# Altium PCB TempHumidPCBV2.PcbDoc
Units mil, origin at the board's own origin, x right, y up, seen from the top; angles counter-clockwise.
Board outline 2150 x 1935 mil, 2 copper layers (Top Layer, Bottom Layer), stack 65.792 mil thick; 51 components, 32 nets, 187 pads, 63 vias.
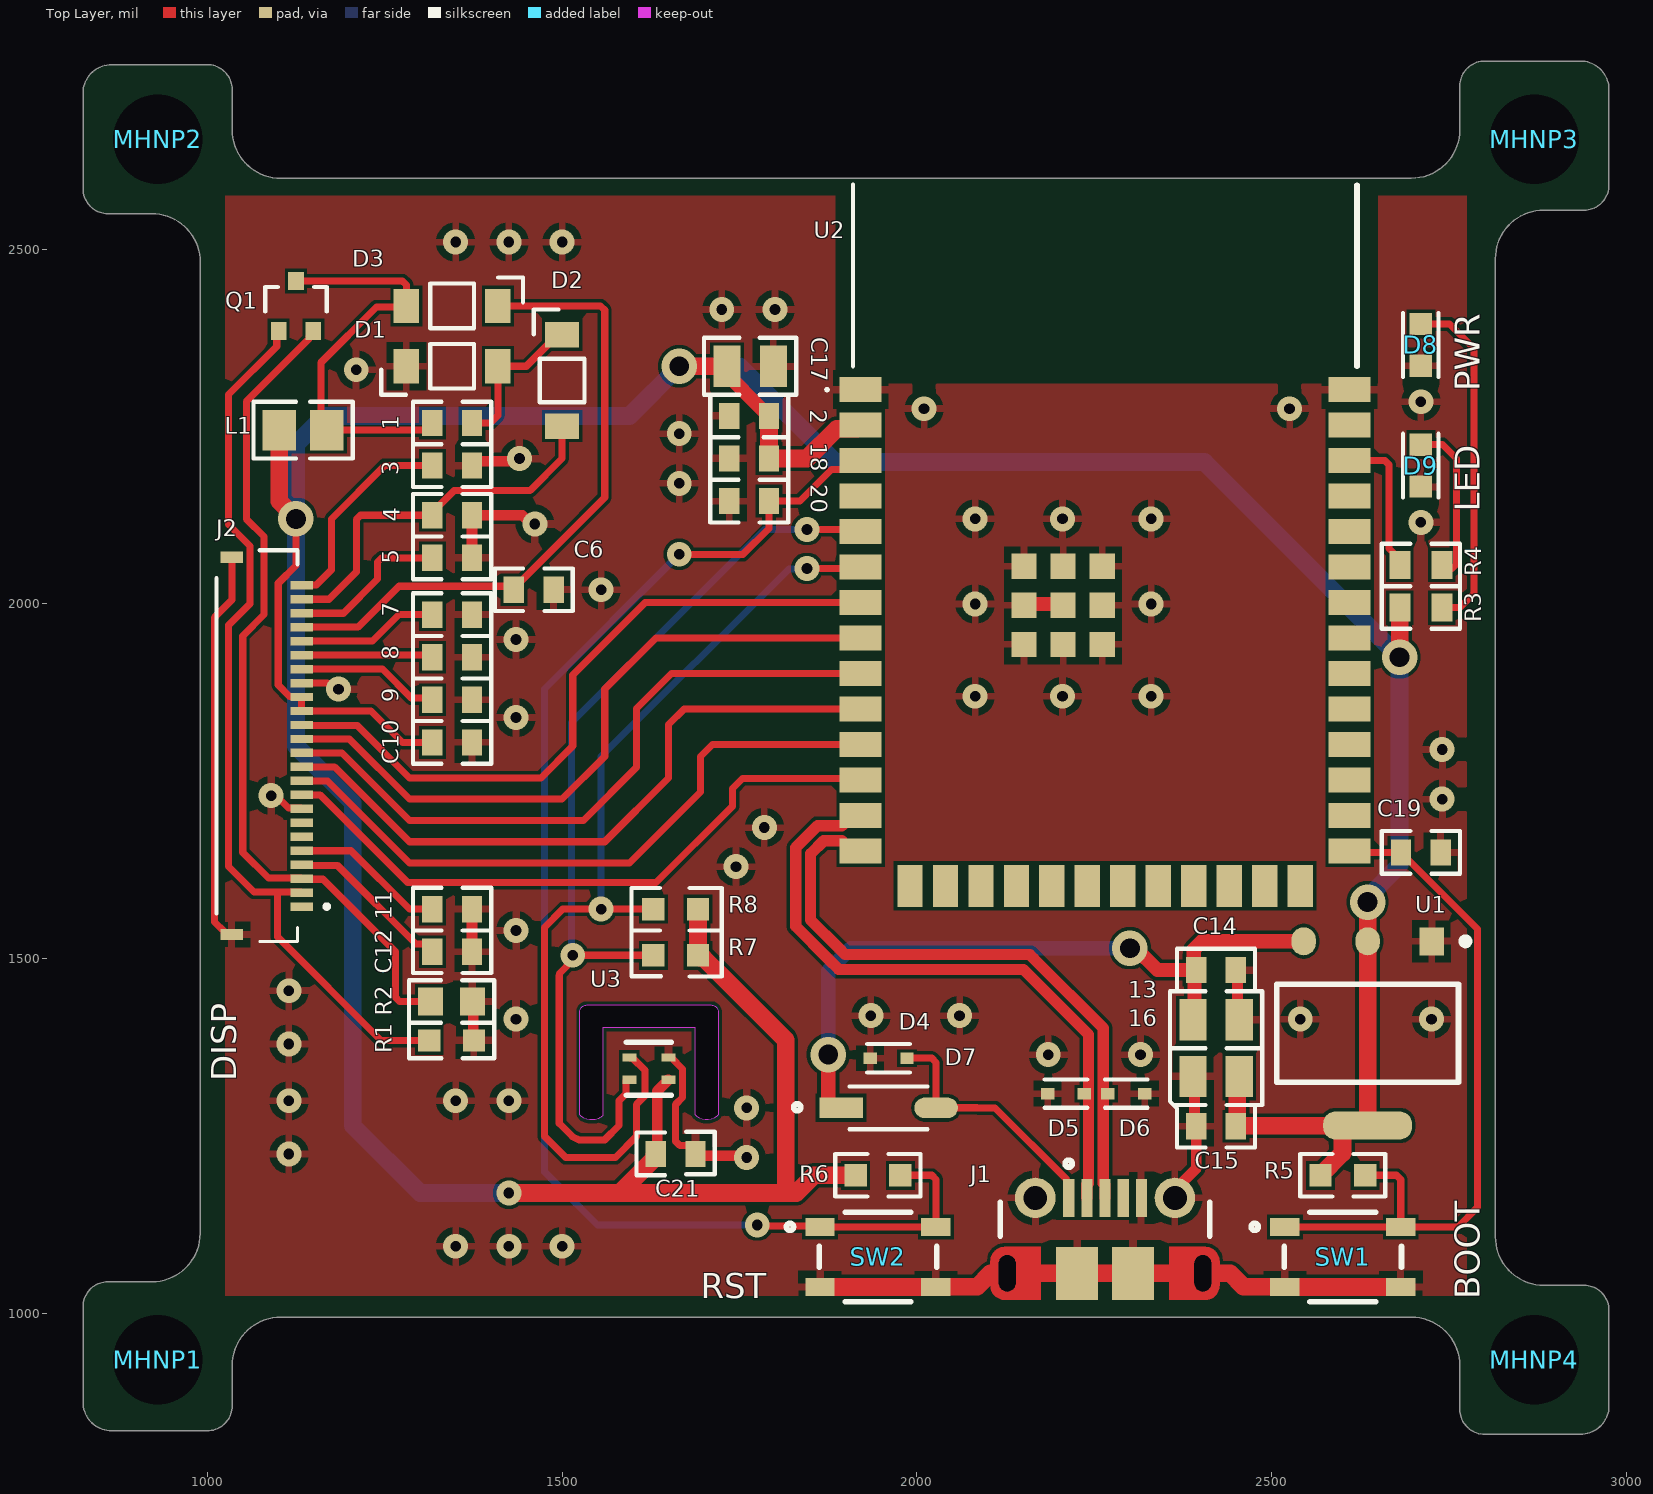
[diagram p0: Top Layer view]
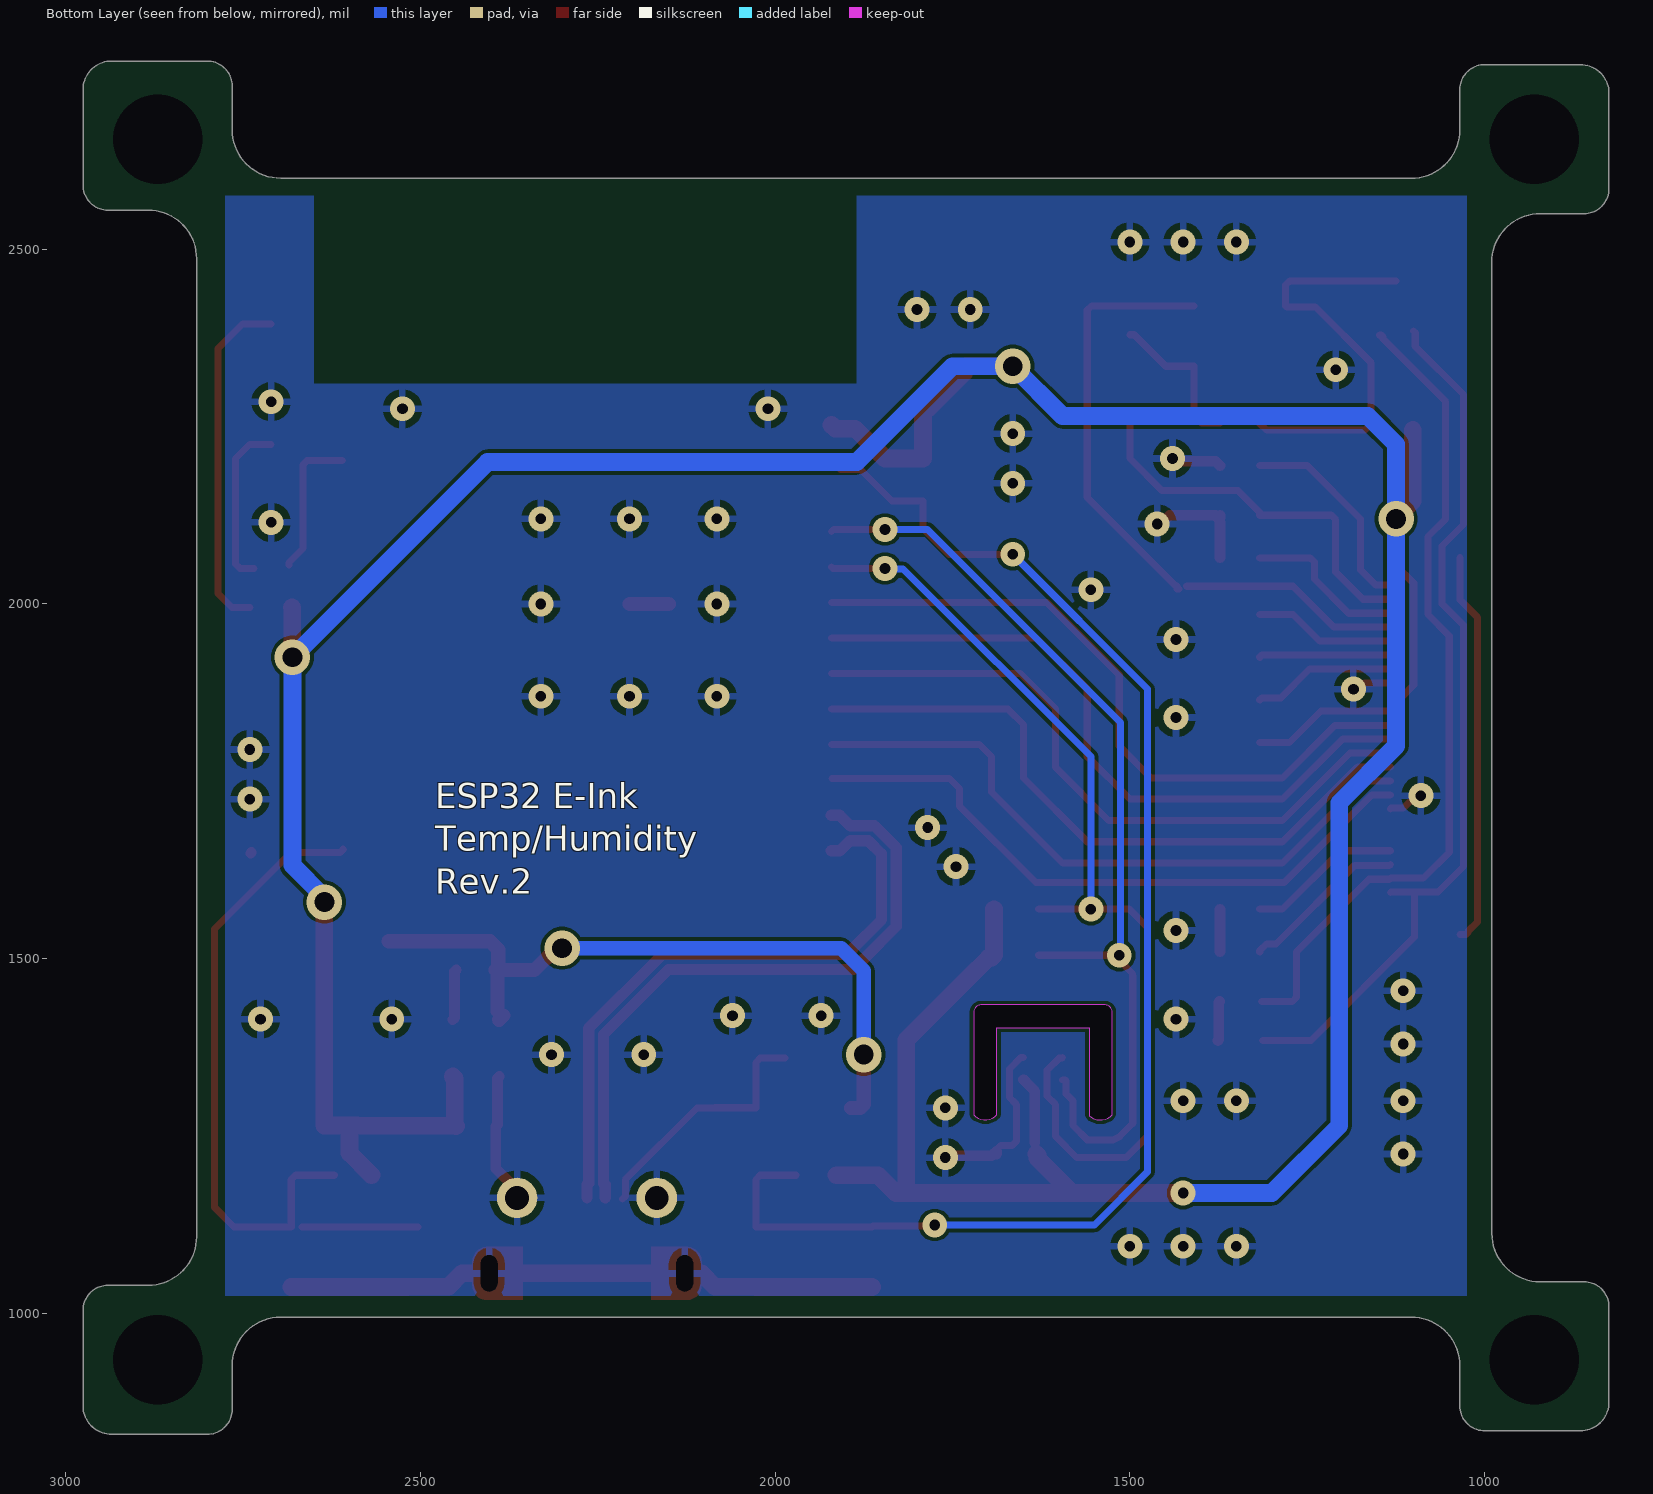
[diagram p1: Bottom Layer view, seen from below]
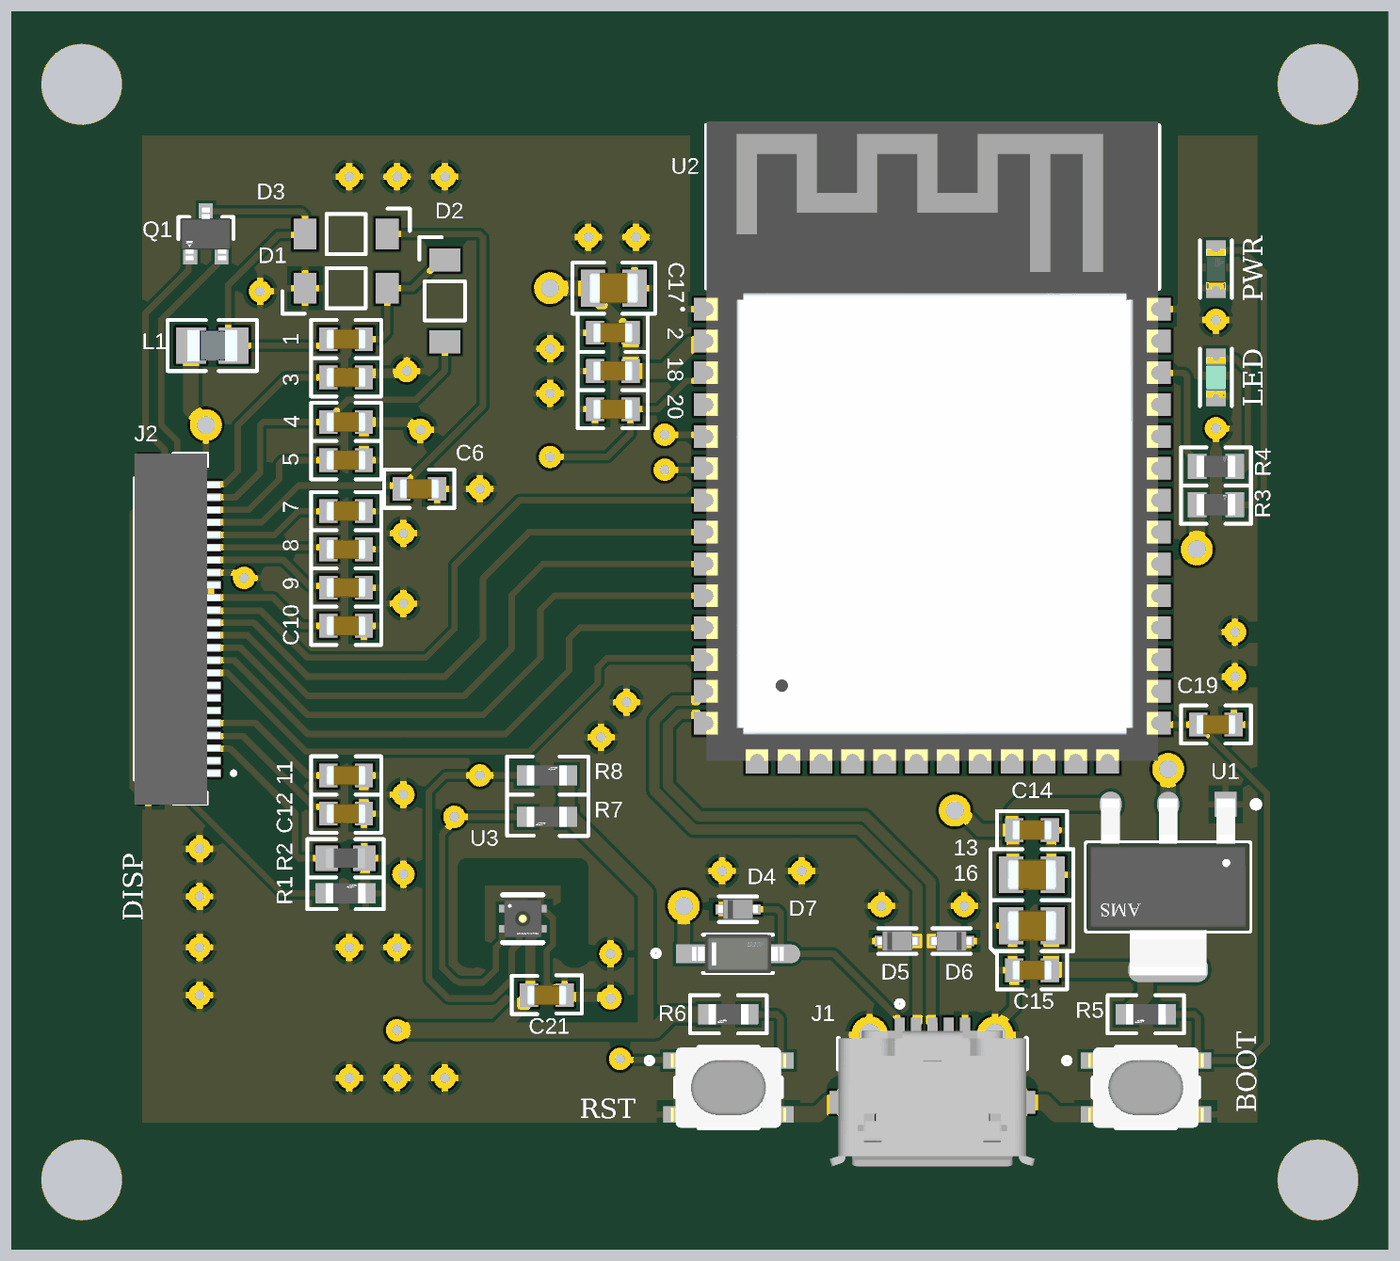
[diagram p2: 3D render of the assembled board from above, using the file's embedded part models]

## Layer stack, top to bottom
Top Solder: solder mask 0.4, Solder Resist, Dk 3.5
Top Layer: signal copper 1.4
Dielectric 1: dielectric 62.992, FR-4, Dk 4.8
Bottom Layer: signal copper 1.4
Bottom Solder: solder mask 0.4, Solder Resist, Dk 3.5

## Board outline
825,875 825,1010 cw(c860,1010) 860,1045 921.72,1045 ccw(c921.72,1113.28) 990,1113.28 990,2481.72 ccw(c921.72,2481.72) 921.72,2550 860,2550 cw(c860,2585) 825,2585 825,2720 cw(c865,2720) 865,2760 1000,2760 cw(c1000,2725) 1035,2725 1035,2668.28 ccw(c1103.28,2668.28) 1103.28,2600 2696.72,2600 ccw(c2696.72,2668.28) 2765,2668.28 2765,2730 cw(c2800,2730) 2800,2765 2935,2765 cw(c2935,2725) 2975,2725 2975,2590 cw(c2940,2590) 2940,2555 2883.28,2555 ccw(c2883.28,2486.72) 2815,2486.72 2815,1108.28 ccw(c2883.28,1108.28) 2883.28,1040 2940,1040 cw(c2940,1005) 2975,1005 2975,870 cw(c2935,870) 2935,830 2800,830 cw(c2800,865) 2765,865 2765,926.72 ccw(c2696.72,926.72) 2696.72,995 1103.28,995 ccw(c1103.28,926.72) 1035,926.72 1035,870 cw(c1000,870) 1000,835 865,835 cw(c865,875)
cut-out: 1525,1280.23 1525,1425 cw(c1535,1425) 1535,1435 1710,1435 cw(c1710,1425) 1720,1425 1720.26,1280 cw(c1703.85,1296.58) 1687.28,1280.17 1687.28,1402.67 1557.28,1402.67 1557.28,1279.17 cw(c1541.67,1295.84)

## Design rules (kind name [scope] priority, off if disabled: settings)
Clearance Clearance_1 [All] p1: gap=5 ignorepadtopadclearanceinfootprint=TRUE
DiffPairsRouting [All] p1: maxlimit=5 minlimit=5 mostfreqgap=5 toplayer_minwidth=16.09 toplayer_maxwidth=16.09 toplayer_prefwidth=16.09 bottomlayer_minwidth=16.09 bottomlayer_maxwidth=16.09 bottomlayer_prefwidth=16.09 impedanceprofiledriven=TRUE maxuncoupledlength=500
HoleSize [All] p1: absolutevalues=TRUE maxlimit=200 minlimit=1 maxpercent=80.000 minpercent=20.000
MinimumSolderMaskSliver [All] p1: minsoldermaskwidth=0
PolygonConnect [All] p1: connectstyle=Relief reliefconductorwidth=10 reliefentries=4 polygonreliefangle="90 Angle" airgapwidth=10
RoutingVias [All] p1: holewidth=15 width=35 viastyle="Through Hole" minholewidth=15 minwidth=35 maxholewidth=28 maxwidth=50
SilkToSilkClearance [All] p1: silktosilkclearance=6
SilkToSolderMaskClearance [IsPad] p1: minsilkscreentomaskgap=6 clearancetoexposedcopper=TRUE
SolderMaskExpansion [All] p1: expansion=4 istentingtop=FALSE
SupplyNets "Schematic Supply Nets_3" [InNet('GND')] p1: voltage=0.000
SupplyNets "Schematic Supply Nets" [InNet('VCC_5V')] p2: voltage=0.000
Width [All] p1: maxlimit=25 minlimit=10 preferedwidth=10
25 further rules are at their usual default settings.

## Classes and differential pairs
component class DriverForDisplay: 3 4 5 7 8 9 10 11 C1 C6 C10 C12 D1 D2 D3 J2 L1 MHNP1 MHNP2 MHNP4 Q1 R1 R2
component class CustomESP32: 2 13 16 18 C14 C15 C17 C19 C20 C21 D4 D5 D6 D7 D8 D9 J1 LED R3 R4 R5 R6 R7 R8 SW1 SW2 U1 U2 U3
differential pair GPIO: +GPIO_P -GPIO_N

## Components (designator, comment, footprint, x,y, rotation, side; value= is the part's Value field where it differs from the comment)
1 "4.7uF" CAPC1608X90N 1345,2255 r0 top (schematic designator C1)
2 "4.7uF" CAPC1608X90N 1763.58,2265 r0 top (schematic designator C2)
3 "1uF 16V" CAPC1608X90N 1345,2195 r0 top (schematic designator C3)
4 "1uF 16V" CAPC1608X90N 1345,2125 r0 top (schematic designator C4)
5 "1uF 16V" CAPC1608X90N 1345,2065 r0 top (schematic designator C5)
7 "1uF 16V" CAPC1608X90N 1345,1985 r0 top (schematic designator C7)
8 "1uF 16V" CAPC1608X90N 1345,1925 r0 top (schematic designator C8)
9 "1uF 16V" CAPC1608X90N 1345,1865 r0 top (schematic designator C9)
11 "1uF 16V" CAPC1608X90N 1345,1570 r0 top (schematic designator C11)
13 "10uF 25V" CAPC2012X145N 2421.42,1414.18 r0 top (schematic designator C13)
16 "10uF 25V" CAPC2012X145N 2421.42,1334.18 r180 top (schematic designator C16)
18 "100nF 50V" CAPC1608X90N 1763.58,2205 r180 top (schematic designator C18)
20 "1uF 16V" CAPC1608X90N 1763.58,2145 r0 top (schematic designator C20)
C6 "1uF 16V" CAPC1608X90N 1460,2020 r0 top
C10 "0.1uF 50V" CAPC1608X90N 1345,1805 r0 top
C12 "1uF 16V" CAPC1608X90N 1345,1510 r0 top
C14 "100nF 50V" CAPC1608X90N 2421.42,1484.18 r0 top
C15 "100nF 50V" CAPC1608X90N 2421.42,1264.18 r180 top
C17 "10uF 25V" CAPC2012X145N 1765,2335 r0 top
C19 "100nF 50V" CAPC1608X90N 2710,1650 r0 top
C21 "100nF 50V" CAPC1608X90N 1660,1225 r180 top
D1 "MBR0530T1G" ONSC-SOD-123-2-425-04_V 1345,2335 r0 top
D2 "MBR0530T1G" ONSC-SOD-123-2-425-04_V 1500,2315 r270 top
D3 "MBR0530T1G" ONSC-SOD-123-2-425-04_V 1345,2420 r180 top
D4 "LESD5D5.0CT1G" LESD5D50CT1G 1960,1360 r0 top
D5 "LESD5D5.0CT1G" LESD5D50CT1G 2210,1310 r0 top
D6 "LESD5D5.0CT1G" LESD5D50CT1G 2295,1310 r180 top
D7 "1N5819HW-7-F" FP-SOD123-IPC_A 1960,1290 r0 top
D8 "RED LED" FP-6_541-5092_01-4-MFG 2710,2365 r90 top
D9 "BLUE LED" FP-6_541-5094_01-4-MFG 2710,2195 r90 top
J1 "Micro USB" USB-MICRO-B_V 2265,1110 r0 top
J2 "FPC24" FH34SRJ24S05SH50 1070,1800 r270 top locked
L1 "68uH" INDC2012X145N 1135,2245 r180 top
MHNP1 "CMP-011-000000-1" MTHNP3P2MM#1 1085,1095 r90 top
MHNP2 "CMP-011-000000-1" MTHNP3P2MM#2 2715,2505 r90 top
MHNP3 "CMP-011-000000-1" MTHNP3P2MM#3 2910,2695 r90 top
MHNP4 "CMP-011-000000-1" MTHNP3P2MM#4 2895,940 r90 top
Q1 "SI1308EDL-T1-GE3" FP-5549-MFG 1125,2420 r90 top
R1 "10k" FP-RC1608-MFG 1344.25,1385 r0 top
R2 "0.47" RESC1608X55N 1344.25,1440 r0 top
R3 "5.1k" FP-CRCW0603-e3-MFG 2710,1995 r0 top
R4 "5.1k" FP-CRCW0603-e3-MFG 2710,2055 r0 top
R5 "10k" FP-RC1608-MFG 2600,1195 r180 top
R6 "10k" FP-RC1608-MFG 1945,1195 r180 top
R7 "10k" FP-RC1608-MFG 1660,1505 r180 top
R8 "10k" FP-RC1608-MFG 1660,1570 r0 top
SW1 "PTS810SJM250SMTRLFS" FP-PTS810SJM250SMTRLFS-MFG 2600,1080 r0 top
SW2 "PTS810SJM250SMTRLFS" FP-PTS810SJM250SMTRLFS-MFG 1945,1080 r0 top
U1 "AMS1117-3.3" FP-AMS1117-IPC_C 2635,1395 r270 top
U2 "ESP32-S3-WROOM-1-N16R8" ESP32S3WROOM1N16R8 2265,2095 r0 top
U3 "SHT40" FP-SHT40-AD1B-R2-MFG 1622.28,1345.17 r0 top

## Footprints (in the part's own frame and the unit in brackets; to place one, negate y for a bottom-side part, rotate by r counter-clockwise, add the part's x,y. Pads: shape width x height; smd on the part's side, far side on the other; paste and mask are expansions set on the pad)
CAPC1608X90N [mm]
  rect 0.73x0.94 smd: 1(-0.71,0) 2(0.71,0)
  body extent -0.8,-0.4 0.8,0.4, height 0.9
CAPC2012X145N [mm]
  rect 0.97x1.47 smd: 1(-0.83,0) 2(0.83,0)
  body extent -1,-0.63 1,0.63, height 1.45
ESP32S3WROOM1N16R8 [mm]
  rect 1.5x0.9 smd: 1(-8.75,5.26) 2(-8.75,3.99) 3(-8.75,2.72) 4(-8.75,1.45) 5(-8.75,0.18) 6(-8.75,-1.09) 7(-8.75,-2.36) 8(-8.75,-3.63) 9(-8.75,-4.9) 10(-8.75,-6.17) 11(-8.75,-7.44) 12(-8.75,-8.71) 13(-8.75,-9.98) 14(-8.75,-11.25) 27(8.75,-11.25) 28(8.75,-9.98) 29(8.75,-8.71) 30(8.75,-7.44) 31(8.75,-6.17) 32(8.75,-4.9) 33(8.75,-3.63) 34(8.75,-2.36) 35(8.75,-1.09) 36(8.75,0.18) 37(8.75,1.45) 38(8.75,2.72) 39(8.75,3.99) 40(8.75,5.26)
  rect 0.9x1.5 smd: 15(-6.985,-12.5) 16(-5.715,-12.5) 17(-4.445,-12.5) 18(-3.175,-12.5) 19(-1.905,-12.5) 20(-0.635,-12.5) 21(0.635,-12.5) 22(1.905,-12.5) 23(3.175,-12.5) 24(4.445,-12.5) 25(5.715,-12.5) 26(6.985,-12.5)
  rect 0.9x0.9 smd: 41(-1.5,-2.46) 42(-2.9,-1.06) 43(-2.9,-2.46) 44(-2.9,-3.86) 45(-1.5,-3.86) 46(-0.1,-3.86) 47(-0.1,-2.46) 48(-0.1,-1.06) 49(-1.5,-1.06)
  silkscreen extent -10,5.21 9.02,12.61, body extent -9,-12.75 9,12.75, height 3.26
FH34SRJ24S05SH50 [mm]
  rect 0.3x0.8 smd: 1(5.75,1.6) 2(5.25,1.6) 3(4.75,1.6) 4(4.25,1.6) 5(3.75,1.6) 6(3.25,1.6) 7(2.75,1.6) 8(2.25,1.6) 9(1.75,1.6) 10(1.25,1.6) 11(0.75,1.6) 12(0.25,1.6) 13(-0.25,1.6) 14(-0.75,1.6) 15(-1.25,1.6) 16(-1.75,1.6) 17(-2.25,1.6) 18(-2.75,1.6) 19(-3.25,1.6) 20(-3.75,1.6) 21(-4.25,1.6) 22(-4.75,1.6) 23(-5.25,1.6) 24(-5.75,1.6)
  rect 0.4x0.8 smd: MP1(6.75,-0.9) MP2(-6.75,-0.9)
  silkscreen extent -7,-1.45 7,2.55, body extent -7,-1.45 7,1.97, height 1.85
FP-6_541-5092_01-4-MFG [mm]
  rect 0.8x0.8 smd paste+0 mask+0: 1(-0.75,0) 2(0.75,0)
  body extent -1.25,-0.6 1.25,0.6, height 0.25
FP-6_541-5094_01-4-MFG [mm]
  rect 0.8x0.8 smd paste+0 mask+0: 1(-0.75,0) 2(0.75,0)
  body extent -1.25,-0.6 1.25,0.6, height 0.25
FP-5549-MFG [mil]
  rect 25.51x22.01 smd paste+0 mask+0: 1(-35.26,24.51) 2(-35.26,-24.51) 3(35.26,0)
  silkscreen extent -8,-43 27,43, body extent -52,-47 52,47, height 10
FP-AMS1117-IPC_C [mm]
  rect 1.004x0.872 smd paste+0 mask+0: 1(-3.295,2.29)
  rrect100% 1.004x0.872 smd paste+0 mask+0: 2(-3.295,0) 3(-3.295,-2.29)
  rrect87% 1.004x3.182 smd paste+0 mask+0: 4(3.295,0)
  silkscreen extent -3.42,-3.25 1.75,3.63, body extent -3.9,-3.35 3.9,3.35, height 0.25
FP-CRCW0603-e3-MFG [mm]
  rect 0.75x1 smd paste+0 mask+0: 1(-0.75,0) 2(0.75,0)
  body extent -1.22,-0.6 1.22,0.6, height 0.25
FP-PTS810SJM250SMTRLFS-MFG [mm]
  rect 1.05x0.65 smd paste+0 mask+0: 1(-2.075,1.075) 2(2.075,1.075) 3(-2.075,-1.075) 4(2.075,-1.075)
  silkscreen extent -3.27,-1.6 2.1,1.6, body extent -2.7,-1.7 2.7,1.7, height 0.25
FP-RC1608-MFG [mm]
  rect 0.8x0.8 smd paste+0 mask+0: 1(-0.8,0) 2(0.8,0)
  body extent -1.3,-0.55 1.3,0.55, height 0.25
FP-SHT40-AD1B-R2-MFG [mm]
  rect 0.5x0.3 smd paste+0 mask+0: 1(-0.7,0.4) 2(-0.7,-0.4) 3(0.7,-0.4) 4(0.7,0.4)
  silkscreen extent -0.8,-0.95 0.8,0.95, body extent -1.05,-0.9 1.05,0.9, height 0.25
FP-SOD123-IPC_A [mil]
  rect 61.32x29.23 smd paste+0 mask+0: 1(-66.94,0)
  rrect100% 61.32x29.23 smd paste+0 mask+0: 2(66.94,0)
  silkscreen extent -134,-4 -124,6, body extent -117,-50 117,50, height 10
INDC2012X145N [mm]
  rect 1.2x1.45 smd: 1(-0.85,0) 2(0.85,0)
  body extent -1,-0.63 1,0.63, height 1.45
LESD5D50CT1G [mm]
  rect 0.48x0.4 smd: 1(-0.66,0) 2(0.66,0)
  body extent -0.8,-0.4 0.8,0.4, height 0.6
MTHNP3P2MM#1 [mm]
  round 1 hole 3.2: ""(-4.064,3.937)
MTHNP3P2MM#2 [mm]
  round 1 hole 3.2: ""(3.81,45.339)
MTHNP3P2MM#3 [mm]
  round 1 hole 3.2: ""(-1.016,1.016)
MTHNP3P2MM#4 [mm]
  round 1 hole 3.2: ""(-0.127,0.635)
ONSC-SOD-123-2-425-04_V [mm] "SOD, 2-Leads, Body 2.69x1.6mm"
  rect 0.91x1.22 smd: 1(-1.635,0) 2(1.635,0)
  silkscreen extent -0.78,-0.8 0.78,0.8, body extent -1.35,-0.8 1.35,0.8, height 1.35
RESC1608X55N [mm]
  rect 0.9x1 smd: 1(-0.75,0) 2(0.75,0)
  body extent -0.77,-0.4 0.78,0.4, height 0.45
USB-MICRO-B_V [mm] "USB, MICRO B, Body 7.491x4.695 mm, Pitch 0.65 mm"
  rect 0.4x1.35 smd: 1(-1.3,1.35) 2(-0.65,1.35) 3(0,1.35) 4(0.65,1.35) 5(1.3,1.35)
  round 1.45 hole 0.85: 6(-2.5,1.35) 7(2.5,1.35)
  rrect50% 0x0 hole 0.6 slot 1.3 at 90 deg: 8(-3.5,-1.35) 11(3.5,-1.35)
  rect 1.5x1.9 smd: 9(-1,-1.35) 10(1,-1.35)
  Top Layer circle w0.5: c3.6,-0.9 r0.25
  Top Layer circle w0.5: c3.6,-1.8 r0.25
  Top Layer circle w0.5: c-3.6,-0.9 r0.25
  Top Layer circle w0.5: c-3.6,-1.8 r0.25
  Top Layer region: -2.3,-2.3 -2.3,-0.4 -3.6,-0.4 -3.6,-2.3
  Top Layer region: 2.3,-0.4 2.3,-2.3 3.6,-2.3 3.6,-0.4
  Top Layer region: 3.6,-0.9 3.6,-1.8 4.1,-1.8 4.1,-0.9
  Top Layer region: -3.6,-1.8 -3.6,-0.9 -4.1,-0.9 -4.1,-1.8
  silkscreen extent -3.75,-0.01 3.75,2.7, body extent -4.1,-3.9 4.1,1.5, height 2.67

## Part data
1 2: library part CL10A475KO8NNNC, "Capacitor", Manufacturer_Name=SAMSUNG, Mouser Part Number=187-CL10A475KO8NNNC, Arrow Part Number=CL10A475KO8NNNC, Arrow Price/Stock=https://www.arrow.com/en/products/cl10a475ko8nnnc/samsung-electro-mechanics?utm_currency=USD&region=europe, Datasheet Link=https://rs.componentsearchengine.com/Datasheets/2/CL10A475KO8NNNC.pdf, Height=0.9mm, Manufacturer_Part_Number=CL10A475KO8NNNC, Mouser Price/Stock=https://www.mouser.co.uk/ProductDetail/Samsung-Electro-Mechanics/CL10A475KO8NNNC?qs=X6jEic%2FHinAbIjmLnFfqqQ%3D%3D
3 4 5 7 8 9 11 20 C6 C12: library part CL10A105KO8NNNC, "Samsung Electro-Mechanics 0603 CL 1μF Ceramic Multilayer Capacitor, 16 V, +85°C, X5R Dielectric, ±10% SMD", Manufacturer_Name=SAMSUNG, Mouser Part Number=187-CL10A105KO8NNNC, Arrow Part Number=CL10A105KO8NNNC, Arrow Price/Stock=https://www.arrow.com/en/products/cl10a105ko8nnnc/samsung-electro-mechanics?region=nac, Datasheet Link=https://labcenter.componentsearchengine.com/Datasheets/2/CL10A105KO8NNNC.pdf, Height=0.9mm, Manufacturer_Part_Number=CL10A105KO8NNNC, Mouser Price/Stock=https://www.mouser.co.uk/ProductDetail/Samsung-Electro-Mechanics/CL10A105KO8NNNC?qs=hqM3L16%252BxlfR4qamq4FMLg%3D%3D
13 16 C17: library part CL21A106KAYNNNG, "Cap Ceramic 10uF 25V X5R 10% SMD 0805 85C Embossed T/R", Manufacturer_Name=SAMSUNG, Mouser Part Number=187-CL21A106KAYNNNG, Arrow Part Number=CL21A106KAYNNNG, Arrow Price/Stock=https://www.arrow.com/en/products/cl21a106kaynnng/samsung-electro-mechanics?region=nac, Datasheet Link=https://www.arrow.com/en/products/cl21a106kaynnng/samsung-electro-mechanics, Height=1.45mm, Manufacturer_Part_Number=CL21A106KAYNNNG, Mouser Price/Stock=https://www.mouser.co.uk/ProductDetail/Samsung-Electro-Mechanics/CL21A106KAYNNNG?qs=yOVawPpwOwl2HL%252Buj2PlNg%3D%3D
18 C14 C15 C19 C21: library part GRM188R71H104KA93D, "Ceramic SMT capacitor 100nF 50Vdc Murata 0603 GRM 100nF Ceramic Multilayer Capacitor, 50 V dc, +125?C, X7R Dielectric, ?10%", Manufacturer_Name="Murata Electronics", Mouser Part Number=81-GRM39X104K50D, Arrow Part Number=GRM188R71H104KA93D, Arrow Price/Stock=https://www.arrow.com/en/products/grm188r71h104ka93d/murata-manufacturing?region=europe, Datasheet Link=https://datasheet.datasheetarchive.com/originals/distributors/Datasheets_SAMA/ec4f1577dddcc7a13ddad897a28002d3.pdf, Height=0.9mm, Manufacturer_Part_Number=GRM188R71H104KA93D, Mouser Price/Stock=https://www.mouser.co.uk/ProductDetail/Murata-Electronics/GRM188R71H104KA93D?qs=f7ZljCwbPOm85Y6l%2FNGt7A%3D%3D
C10: library part CL10A105KO8NNNC, "Ceramic SMT capacitor 100nF 50Vdc Murata 0603 GRM 100nF Ceramic Multilayer Capacitor, 50 V dc, +125?C, X7R Dielectric, ?10%", Manufacturer_Name=SAMSUNG, Mouser Part Number=187-CL10A105KO8NNNC, Arrow Part Number=CL10A105KO8NNNC, Arrow Price/Stock=https://www.arrow.com/en/products/cl10a105ko8nnnc/samsung-electro-mechanics?region=nac, Datasheet Link=https://labcenter.componentsearchengine.com/Datasheets/2/CL10A105KO8NNNC.pdf, Height=0.9mm, Manufacturer_Part_Number=CL10A105KO8NNNC, Mouser Price/Stock=https://www.mouser.co.uk/ProductDetail/Samsung-Electro-Mechanics/CL10A105KO8NNNC?qs=hqM3L16%252BxlfR4qamq4FMLg%3D%3D
D1 D2 D3: library part CMP-1055-00413-1, "Schottky Power Rectifier, 2-Pin SOD-123, Pb-Free, Tape and Reel A for Anode K for Cathode (triangle points to cathode)", Manufacturer="On Semiconductor", ComponentLink1Description="Manufacturer URL", ComponentLink1URL=http://www.onsemi.com/, ComponentLink2Description=Datasheet, ComponentLink2URL=http://www.onsemi.cn/pub_link/Collateral/MBR0530T1-D.PDF, ComponentLink3Description="Package Specification", ComponentLink3URL=http://www.onsemi.com/pub_link/Collateral/425-04.PDF, Configuration=Single, DatasheetVersion="Rev. 7", IFSM Max (A)=5.5, Mounting Technology="Surface Mount", PackageDescription="2-Pin SOD, Body 1.6 x 2.69 mm", PackageReference=SOD-123-2-425-04, PackageVersion="Rev. G, 10/2009", Packing="Tape and Reel", PartNumber=MBR0530T1G, RoHS=TRUE
D4 D5 D6: "TVS Diode (Bi-directional)", Manufacturer_Name=LRC, Height=0.7mm, Manufacturer_Part_Number=LESD5D5.0CT1G
D7: library part CMP-0303-00003-3, "DIODE SCHOTTKY 40V 1A SOD123", Average Rectified Current=1A, Capacitance=110pF, Case/Package=SOD-123-2, Forward Voltage=450mV, Max Forward Surge Current (Ifsm)=25A, Max Operating Temperature=125°C, Max Power Dissipation=450mW, Max Repetitive Reverse Voltage (Vrrm)=40V, Min Operating Temperature=-65°C, Package Quantity=3000, Peak Reverse Current=50uA, Contact Plating=Tin, Current Rating=1A, Element Configuration=Single, Forward Current=1A, Height=1.25mm, Lead Free="Lead Free", Length=2.85mm, Max Reverse Voltage (DC)=40V, Number of Pins=2, Output Current=1A, Packaging="Tape and Reel", Peak Non-Repetitive Surge Current=25A, Polarity=Standard, Radiation Hardening=No, REACH SVHC="No SVHC", Termination=SMD/SMT, Voltage Rating (DC)=40V, Weight=0.000353oz, Width=1.7mm
D8: library part CMP-02520-000012-1, "LED RED 0603 SMD", Ambient Temperature Range High=+85°C, Ambient Temperature Range Low=-35°C, Colour=Red, Forward Current=20mA, Forward Voltage=2V, Manufacturer=Vishay, Manufacturer Part Number=VLMS1300-GS08, Package=6.541-5092.01-4, Power Dissipation=75mW, Reverse Voltage=5V, Temperature="-35°C to +85°C", Automotive=No, Category=Diode, ComponentLink2Description=Datasheet, ComponentLink2URL=http://www.vishay.com/docs/82437/vlmo1300.pdf, Device Class L1=Optoelectronics, Device Class L2=LEDs, Device Class L3=unset, Digikey Description="LED RED 0603 SMD", Height=1mm, Lead Free=Yes, Led Orientation="Top View", Luminous Intensity=54mcd, Mouser Description="Standard LEDs - SMD Super Red Clear Non-Diff", Octopart=https://octopart.com/vlms1300-gs08-vishay-21709201, Peak Emmision Wavelength=639nm, RoHS=TRUE, Temperature Range High=+85°C, Temperature Range Low=-35°C, Viewing Angle=130°, Wavelength=631nm
D9: library part CMP-02520-000013-1, "LED BLUE 0603 SMD", Ambient Temperature Range High=+80°C, Ambient Temperature Range Low=-20°C, Colour=Blue, Forward Current=20mA, Forward Voltage=3.8V, Manufacturer="Vishay Semiconductor Opto Division", Manufacturer Part Number=VLMB1300-GS08, Package=6.541-5094.01-4, Power Dissipation=76mW, Temperature="-20°C to +80°C", Automotive=No, Category=Diode, ComponentLink2Description=Datasheet, ComponentLink2URL=http://www.vishay.com/docs/82437/vlmo1300.pdf, Device Class L1=Optoelectronics, Device Class L2=LEDs, Device Class L3=unset, Digikey Description="LED BLUE 0603 SMD", Height=1mm, Lead Free=Yes, Led Orientation="Top View", Luminous Intensity=28-180mcd, Mouser Description="LED; SMD; 0603; blue; 28-180mcd; 1.6x0.8x0.8mm; 130°; 2.8÷3.8V; 20mA", Octopart=https://octopart.com/vlmb1300-gs08-vishay-22022408, Peak Emmision Wavelength=468nm, RoHS=TRUE, Temperature Range High=+80°C, Temperature Range Low=-20°C, Viewing Angle=130°, Wavelength=475nm
J1: library part CMP-2000-05827-1, "Micro-USB B Receptacle, Right Angle, Bottom Mount, Surface Mount, with Solder Tabs, -30 to 85 degC, 5-Pin USB, RoHS, Tape and Reel", Manufacturer=Molex, Package Description="5-Leads USB, Micro B, Body 7.5 x 5 mm, Pitch 0.65 mm", Package Reference=MICRO-B, Package Version="Rev. F, 12/2012", Standard Package=1, Voltage - Max=30V, 3D Model=105017-0001.stp, Catalog Drawings=1050170001, Category=Connectors,Interconnects, Circuits=5, Connector Type=USB-microB, Datasheet URL=http://www.molex.com/elqNow/elqRedir.htm?ref=http://www.molex.com/webdocs/datasheets/pdf/en-us/1050170001_IO_CONNECTORS.pdf, Datasheet Version=03/2016, Family=USB,DVI,HDMIConnectors, Featured Product=Micro-USBConnectorsUSBConnectors, Features=Shielded,SolderRetention, Gender=Receptacle, Ingress Protection=-, Manufacturer URL=http://www.molex.com/, Mating Products=WM17145-ND-CABLEMICROUSBBTOSTDA1.0MWM17147-ND-CABLEMICROUSBBTOSTDA2.0MWM17146-ND-CABLEMICROUSBBTOSTDA1.5M, Mounting Technology=SurfaceMount, Mounting Type=BoardCutout,SurfaceMount,RightAngle, Number of Contacts=5, Online Catalog=Molex-MicroUSB, Other Names=WM1399DKR, Package URL=http://www.molex.com/pdm_docs/sd/1050170001_sd.pdf, Packaging=Digi-Reel®, PCN Assembly/Origin=ResinSupplier21/Oct/2015, RoHS Information=1050170001CertofCompliance, Series=-, Specifications=-
J2: library part FH34SRJ-24S-0.5SH_50_, "Connector", Manufacturer_Name=Hirose, Manufacturer_Part_Number=FH34SRJ-24S-0.5SH(50), Mouser Part Number=798-FH34SRJ24S05SH50, Datasheet Link=https://datasheet.datasheetarchive.com/originals/distributors/DKDS-30/592742.pdf, Height=1.75mm, Mouser Price/Stock=https://www.mouser.co.uk/ProductDetail/Hirose-Connector/FH34SRJ-24S-0.5SH50?qs=iyLo5FA4poC8fzWlavnA7A%3D%3D
L1: library part MLF2012C680KT000, "Inductor", Manufacturer_Name=TDK, Mouser Part Number=810-MLF2012C680KT000, Arrow Part Number=MLF2012C680KT000, Arrow Price/Stock=https://www.arrow.com/en/products/mlf2012c680kt000/tdk?region=nac, Datasheet Link=https://product.tdk.com/system/files/dam/doc/product/inductor/inductor/smd/catalog/inductor_commercial_standard_mlf2012_en.pdf, Height=1.45mm, Manufacturer_Part_Number=MLF2012C680KT000, Mouser Price/Stock=https://www.mouser.com/Search/Refine.aspx?Keyword=810-MLF2012C680KT000
MHNP1 MHNP2 MHNP3 MHNP4: "Mounting Hole Non-Plated 3.2 mm drill hole", Manufacturer=N/A, Design Item ID=MTHNP3P2MM, Manufacturer Part Number=N/A, Source=LiPoBattery_A.SCHLIB
Q1: library part CMP-02550-000099-2, "MOSFET N-CH 30V 1.4A SC-70-3", Case/Package=SOT-323, Continuous Drain Current (ID)=1.5A, Drain to Source Breakdown Voltage=30V, Drain to Source Resistance=132mR, Gate to Source Voltage (Vgs)=12V, Input Capacitance=105pF, Max Operating Temperature=150°C, Max Power Dissipation=500mW, Min Operating Temperature=-55°C, Package Quantity=3000, Power Dissipation=400mW, Threshold Voltage=600mV, Drain to Source Voltage (Vdss)=30V, Drain-source On Resistance-Max=132mR, Element Configuration=Single, Fall Time=8ns, Height=1mm, Lead Free="Lead Free", Length=2.2mm, Mount="Surface Mount", Number of Channels=1, Number of Elements=1, Number of Pins=3, On-State Resistance=132mR, Packaging="Tape and Reel", Polarity=N-CHANNEL, Radiation Hardening=No, Rds On Max=132mR, REACH SVHC="No SVHC", Rise Time=9ns, RoHS Compliant=Yes, Series=TrenchFET®, Turn-Off Delay Time=8ns, Turn-On Delay Time=2ns, Weight=0.004395oz, Width=1.35mm
R1 R5 R6 R7 R8: library part CMP-13261-001097-1, "Res Thick Film 0603 10kΩ 1% 0.1W ±100ppm/°C Molded SMD T/R", Case Code (Imperial)=0603, Case Code (Metric)=1608, Max Operating Temperature=155°C, Max Power Dissipation=100mW, Min Operating Temperature=-55°C, Resistance=10kR, Temperature Coefficient=100ppm/°C, Tolerance=1%, Case/Package=0603, Composition="Thick Film", Contact Plating=Tin, Depth=0.8mm, Features="Moisture Resistant", Height=0.022inch, Length=0.063inch, Military Standard=Not, Number of Terminations=2, Packaging="Tape and Reel", Power Rating=100mW, Radiation Hardening=No, Width=0.031inch
R2: library part RMCF0603JTR470, "RES, 0603, 0.47 ohm, 5%, 0.1W", Manufacturer_Name="Stackpole Electronics", Datasheet Link=https://www.seielect.com/Catalog/SEI-RMCF_RMCP.pdf, Height=0.55mm, Manufacturer_Part_Number=RMCF0603JTR470
R3 R4: library part CMP-1012-00590-3, "RES Thick Film, 5.1kΩ, 1%, 0.1W, 100ppm/°C, 0603", Case Code (Imperial)=0603, Case Code (Metric)=1608, Max Operating Temperature=155°C, Min Operating Temperature=-55°C, Package Quantity=5000, Power Rating=100mW, Resistance=5.1kR, Temperature Coefficient=100ppm/°C, Tolerance=1%, Voltage Rating=75V, Case/Package=0603, Composition="Thick Film", Contact Plating=Tin, Depth=0.85mm, Height=0.45mm, Lead Free="Lead Free", Length=1.55mm, Military Standard=Not, Mount="Surface Mount", Packaging="Tape and Reel", Radiation Hardening=No, Termination=SMD/SMT, Voltage Rating (DC)=75V, Weight=7.1E-05oz, Width=0.85mm
SW1 SW2: library part CMP-10040-000001-2, "SWITCH TACTILE SPST-NO 0.05A 16V", Case/Package=SMD/SMT, Color=Black, Current Rating=50mA, Max Operating Temperature=85°C, Min Operating Temperature=-40°C, Operating Force=160gf, Package Quantity=2900, Voltage Rating (DC)=16V, Actuator Type=Standard, Contact Plating=Silver, Depth=4.6mm, Illumination Type=Non-Illuminated, Lead Free="Lead Free", Length=3.2mm, Max Current Rating=50mA, Mechanical Life=150000Cycles, Mount="Surface Mount", Orientation=Straight, Packaging="Tape and Reel", RoHS Compliant=Yes, Switch Function=Off-Mom, Switch Travel=0.15mm, Termination=J-Bend, Throw Configuration=SPST
U1: library part CMP-209535-000001-1, "LDO Voltage Regulators 1A, 3.3V", Dropout Voltage=1.1V, Manufacturer="Advanced Monolithic Systems", Max Junction Temp=+125°C, Max Power Dissipation=1.2W, Max Supply Voltage=15V, Nominal Supply Current=5mA, Output Current=1A, Output Voltage=3.3V, Package=AMS1117, Temperature="-40°C to +125°C", Temperature Range Low=-40°C, Automotive=No, Category=IC, ComponentLink2Description=Datasheet, ComponentLink2URL=http://www.advanced-monolithic.com/pdf/ds1117.pdf, Device Class L1="Integrated Circuits (ICs)", Device Class L2="Power Management ICs", Device Class L3="Voltage Regulators - Linear", Height=1.8mm, Ipc Land Pattern Name=SOT229P700X180-4, Lead Free=Yes, Manufacturer Part Number=AMS1117-3.3, Number Of Outputs=1, Octopart=https://octopart.com/ams1117-3.3-advanced+monolithic+systems-25899300, Output Type=Fixed, RoHS=TRUE, Standoff Height=0.64mm, Temperature Range High=+125°C
U2: "Integrated Circuit", Manufacturer_Name="Espressif Systems", Mouser Part Number=356-ESP32S3WRM1N16R8, Datasheet Link=https://www.espressif.com/sites/default/files/documentation/esp32-s3-wroom-1_wroom-1u_datasheet_en.pdf, Height=3.25mm, Manufacturer_Part_Number=ESP32-S3-WROOM-1-N16R8, Mouser Price/Stock=https://www.mouser.co.uk/ProductDetail/Espressif-Systems/ESP32-S3-WROOM-1-N16R8?qs=Li%252BoUPsLEnvQc9gW6AMhZg%3D%3D
U3: library part CMP-144040-000008-1, "SENSOR HUMIDITY 100 RH SMD"

## Via types
v1: diameter 35, hole 15, Top Layer to Bottom Layer, 57 vias
v2: diameter 50, hole 28, Top Layer to Bottom Layer, 6 vias

## Nets (pads, with @x,y where several pads share a name; then routed paths per layer and width w, separated by ;. In a path a pad name is that pad's centre, name@x,y a point inside that pad or via, vN(x,y) a via of type N, cw(c..) or ccw(c..) an arc to the next point about the centre after c; other vN are vias at no path point)
CHIP_PU: 20.2 R6.1 SW2.1 SW2.2 U2.3 | length 1990.6
  Top Layer w10: v1(1665,2070) 1755,2070 1791.54,2106.54 20.2 1835,2145 1879.37,2189.37 1907.8,2189.37 U2.3 ; v1(1775,1125) 1776.34,1123.66 1861.97,1123.66 SW2.1 SW2.2 2026.69,1189.14 2020.84,1195 R6.1 R6.1@1970.64,1195
  Bottom Layer w10: v1(1665,2070) 1475,1880 1475,1200 1550,1125 v1(1775,1125)
GND: 2.1 3.2 4.2 5.2 7.2 8.2 9.2 11.2 13.2 16.2 18.2 20.1 C6.2 C10.2 C12.2 C14.2 C15.2 C17.2 C19.2 C21.1 D1.1 D4.1 D5.1 D6.1 D8.1 D9.1 J1.5 J1.6 J1.7 J1.8 J1.9 J1.10 J1.11 J2.8 J2.17 J2.MP1 J2.MP2 R1.2 R2.2 SW1.3 SW1.4 SW2.3 SW2.4 U1.1 U2.1 U2.40 U2.41 U2.42 U2.43 U2.44 U2.45 U2.46 U2.47 U2.48 U2.49 U3.4 | length 2380.5
  Top Layer w10: J2.MP1 1026.69,1534.25 1023.82,1537.13 1023.82,1538.31 1010,1552.13 1010,1981.21 1034.57,2005.78 J2.MP2 ; v1(1090,1730) 1096.76,1730 1114.44,1712.32 1132.09,1712.32 J2.8 ; J2.17 1169.65,1888.58 1178.24,1880 v1(1185,1880) ; U3.4 1653.77,1360.91 1669.68,1345.01 1669.68,1304.68 1660,1295 1660,1242.85 1665.86,1236.99 1682.38,1236.99 C21.1@1684.37,1235
  Top Layer w15: C12.2 11.2 ; 5.2 4.2@1372.95,2115 ; 4.2 1372.95,2121.87 1376.69,2121.87 1379.82,2125 1444.02,2125 1456.25,2112.77 v1(1461.66,2112.77) ; 3.2 1379.13,2201.17 1436.17,2201.17 v1(1440,2205) ; R2.2 1374.76,1439.02 1374.76,1385.98 R1.2 ; C21.1 C21.1@1687.95,1229.13 ; C21.1@1692.09,1225 1694.59,1222.5 1757.5,1222.5 v1(1760,1220) ; J1.7 2363.43,1174.54 2393.46,1204.58 C15.2 2391.1,1266.54 2391.1,1331.82 16.2 ; C14.2 2451.73,1481.82 2451.73,1416.54 13.2 ; C19.2 C19.2@2738.98,1648.98
  Top Layer w20: U2.43@2149.76,2000 U2.41@2204.88,2000
  Top Layer w25: SW2.3 SW2.4 2026.99,1037.97 2084.86,1037.97 2103.74,1056.85 J1.8 J1.9 J1.10 J1.11 2441.26,1056.85 2460.14,1037.97 2518.01,1037.97 SW1.3 SW1.4
  other v1: 1350,1095 1425,1095 1500,1095 1115,1225 1760,1290 1115,1300 1350,1300 1425,1300 2185,1365 2315,1365 1115,1380 1435,1415 2540,1415 2725,1415 1935,1420 2060,1420 1115,1455 1435,1540 1745,1630 1785,1685 2740,1725 2740,1795 1435,1840 2082,1870 2205,1870 2330,1870 1435,1950 2082,2000 2330,2000 1555,2020 2710,2115 2082,2120 2205,2120 2330,2120 1665,2170 1665,2240 2010,2275 2525,2275 2710,2285 1210,2330 1725,2415 1800,2415 1350,2510 1425,2510 1500,2510
GPIO0: C19.1 R5.1 SW1.1 SW1.2 U2.27 | length 1034.9
  Top Layer w10: SW1.1@2503.31,1122.32 SW1.2@2666.69,1122.32 ; U2.27@2608.96,1654.47 2608.43,1653.94 2612.36,1650 C19.1@2676.46,1650 ; R5.1@2620.64,1195 R5.1 2675.84,1195 2681.69,1189.14 2681.69,1131.69 SW1.2 2762.32,1122.32 2790,1150 2790,1542.05 C19.1 C19.1@2676.46,1650 ; C19.1@2675.93,1649.47 C19.1@2676.46,1650
GPIO2: R4.1 U2.38 | length 207.5
  Top Layer w10: U2.38 2659.14,2202.09 2665,2196.23 2665,2078.27 2685,2058.27 R4.1@2685,2055
GPIO5: R7.2 U2.5 U3.2 | length 1382.3
  Top Layer w10: U3.2 1590.78,1329.42 1589.88,1328.51 1589.88,1309.88 1580,1300 1580,1265 1560,1245 1528.03,1245 1523.53,1245 1514.6,1249.41 1513.01,1251 1498.93,1265.06 1496,1267.99 1496,1476.06 1496.32,1479.55 1515,1498.24 v1(1515,1505) R7.2 ; v1(1845,2105) 1917.6,2105 U2.5
  Bottom Layer w10: v1(1515,1505) 1513.03,1506.97 1513.03,1833.03 1785,2105 v1(1845,2105)
GPIO6: R8.1 U2.6 U3.1 | length 1431.4
  Top Layer w10: U3.1 1595.62,1360.01 1599.56,1360.01 1616.58,1342.99 1616.58,1306.58 1605,1295 1605,1250 1575,1220 1505,1220 1475,1250 1475,1544.14 1500.86,1570 v1(1555,1570) R8.1 ; v1(1845,2050) 1918.43,2050 U2.6
  Bottom Layer w10: v1(1555,1570) 1555,1785 1819.52,2049.52 1844.52,2049.52 v1(1845,2050)
GPIO_N: D5.2 J1.2 U2.13 | length 928.1
  Top Layer w16.09: U2.13 1908.7,1702.09 1894.24,1687.63 1859.98,1687.63 1828.91,1656.56 1828.91,1546.09 1875.03,1499.97 1890,1485 2150,1485 2241.66,1393.34 2241.66,1260 2241.66,1183.76 2239.41,1181.51 J1.2
GPIO_P: D6.2 J1.3 U2.14 | length 893.1
  Top Layer w16.09: U2.14 1908.7,1652.09 1894.24,1666.54 1868.72,1666.54 1850,1647.83 1850,1554.82 1889.94,1514.88 1898.73,1506.09 2158.73,1506.09 2164.91,1499.91 2262.75,1402.07 2262.75,1260 2262.75,1183.76 2265,1181.51 J1.3
NetC1_1: 1.1 D3.2 L1.1 Q1.3 | length 592.8
  Top Layer w10: Q1.3 1274.77,2455.26 1280.63,2449.4 D3.2 1279.2,2418.57 1238.57,2418.57 1160,2340 1160,2253.46 L1.1 1307.68,2245 1317.05,2254.37 1.1
NetC1_2: 1.2 D1.2 D2.1 | length 219.2
  Top Layer w10: 1.2 1398.74,2255 1409.37,2265.63 D1.2 1449.53,2335 1493.9,2379.37 D2.1
NetC3_1: 3.1 J2.24 | length 295.9
  Top Layer w10: J2.24 1133.41,2026.8 1153.57,2026.8 1175,2048.22 1175,2120 1250,2195 3.1
NetC4_1: 4.1 D2.2 J2.23 | length 540.6
  Top Layer w10: J2.23 1171.69,2006.69 1210,2045 1210,2119.14 1215.86,2125 4.1 1317.05,2129.13 1347.91,2160 1455,2160 1500,2205 D2.2
NetC5_1: 5.1 J2.22 | length 230.5
  Top Layer w10: J2.22 1192.01,1987.01 1240,2035 1240,2059.14 1245.86,2065 5.1
NetC6_1: C6.1 D3.1 J2.21 | length 914.7
  Top Layer w10: J2.21 1212.32,1967.32 1270,2025 C6.1@1420.08,2025 ; D3.1 1554.14,2420 1560,2414.14 1560,2150.09 C6.1@1433.46,2023.55 ; C6.1@1430.98,2021.07 C6.1@1433.46,2023.55 ; C6.1@1433.46,2021.5 C6.1@1433.46,2023.55 ; C6.1@1433.46,2025.63 C6.1@1433.46,2023.55
NetC7_1: 7.1 J2.20 | length 199.5
  Top Layer w10: J2.20 1232.64,1947.64 1270,1985 7.1
NetC8_1: 8.1 J2.19 | length 185.3
  Top Layer w10: J2.19 1314.09,1927.95 8.1
NetC9_1: 9.1 J2.18 | length 202
  Top Layer w10: J2.18 1246.73,1908.27 1287.47,1867.53 1314.52,1867.53 9.1
NetC11_1: 11.1 J2.5 | length 218.2
  Top Layer w10: J2.5 1202.64,1652.36 1285,1570 11.1
NetC12_1: C12.1 J2.4 | length 235.8
  Top Layer w10: J2.4 1133.9,1631.77 1183.23,1631.77 1293.98,1521.02 1307.68,1521.02 1317.05,1511.65 C12.1
NetD4_2: D4.2 D7.2 J1.1 | length 362.5
  Top Layer w10: D4.2 2021.09,1360 2026.94,1354.14 D7.2 ; D7.2@2027.11,1290.17 2084.83,1290.17 2085,1290 2110,1290 2210.95,1189.06 2210.95,1165.53 J1.1@2215,1161.47
NetD8_2: D8.2 R3.2 | length 488.1
  Top Layer w10: D8.2 2750.47,2394.53 2785,2360 2785,2015 2765,1995 R3.2
NetD9_2: D9.2 R4.2 | length 235.1
  Top Layer w10: D9.2 2740.47,2224.53 2760,2205 2760,2056.43 2753.57,2050 R4.2@2734.23,2050
NetJ2_2: J2.2 Q1.1 R1.1 | length 1264.7
  Top Layer w10: Q1.1 1097.85,2382.1 1097.85,2362.85 1030,2295 1030,2112 1060.32,2081.68 1060.32,2000.32 1030,1970 1030,1630 1065.79,1594.21 1098.94,1594.21 ; J2.2 1132.09,1594.21 1098.94,1594.21 ; R1.1 1245,1385 1098.94,1531.06 1098.94,1594.21
NetJ2_3: J2.3 Q1.2 R2.1 | length 1181.4
  Top Layer w10: Q1.2@1148.5,2378.74 1145.26,2378.74 1143.5,2376.99 1143.5,2373.74 1055,2285.24 1055,2120 1080,2095 1080,1985 1050,1955 1050,1650 1086.1,1613.9 1132.09,1613.9 1133.9,1612.09 1162.91,1612.09 1265,1510 1265,1445.86 1270.86,1440 R2.1
NetJ2_9: J2.9 U2.12 | length 913
  Top Layer w10: J2.9 1158.9,1731.1 1282.5,1607.5 1632.5,1607.5 1740,1715 1740,1740 1753.94,1753.94 U2.12@1919.45,1753.94
NetJ2_10: J2.10 U2.11 | length 934
  Top Layer w10: J2.10 1169.32,1750.79 1285.1,1635 1595,1635 1695,1735 1695,1785 1712.09,1802.09 U2.11
NetJ2_11: J2.11 U2.10 | length 952.6
  Top Layer w10: J2.11 1179.53,1770.47 1285,1665 1560,1665 1650,1755 1650,1830 1672.09,1852.09 U2.10
NetJ2_12: J2.12 U2.9 | length 961.3
  Top Layer w10: J2.12 1189.84,1790.16 1285,1695 1530,1695 1605,1770 1605,1852.87 1654.21,1902.09 U2.9
NetJ2_13: J2.13 U2.8 | length 972.4
  Top Layer w10: J2.13 1200.16,1809.84 1285,1725 1500,1725 1560,1785 1560,1880 1632.09,1952.09 U2.8
NetJ2_14: J2.14 U2.7 | length 979.3
  Top Layer w10: J2.14 1133.9,1828.62 1211.38,1828.62 1285,1755 1470,1755 1515,1800 1515,1900 1617.09,2002.09 U2.7
VCC_3.3V: 2.2 16.1 18.1 C10.1 C15.1 C17.1 C21.2 J2.15 J2.16 L1.2 R3.1 R5.2 R6.2 R7.1 R8.2 U1.2 U1.4 U2.2 U3.3 | length 6249.5
  Top Layer w10: v2@1125,2121.36 v2(1125,2120) 1125,2054.18 1100,2029.18 1100,1885.78 1115.98,1869.8 1132.09,1869.8 J2.16 J2.15 1230.79,1849.21 1275,1805 C10.1
  Top Layer w15: C21.2@1634.08,1240.61 1634.08,1313.66 1647.5,1327.07 1647.5,1327.82 1649.09,1329.42 U3.3
  Top Layer w20: C17.1@1730.91,2335 1730.91,2325.16 1782.56,2273.5 1787.17,2273.5 1791.54,2269.13 2.2
  Top Layer w25: L1.2 1101.54,2144.82 v2@1125,2121.36 ; v1(1425,1170) 1581.18,1170 ; C21.2 1630.18,1223.13 1630.18,1219 1581.18,1170 ; v2(1665,2335) C17.1@1730.91,2335 ; R8.2 R7.1 1694.74,1501.75 1699.01,1501.75 1729.26,1471.5 1815,1385.76 1815,1170 ; 2.2 18.1 1845,2205 1886.87,2246.87 1915.3,2246.87 U2.2 ; R6.2 1855,1195 1830,1170 1815,1170 ; C15.1 C15.1@2449.92,1264.73 ; 16.1 2451.24,1331.33 2451.24,1266.05 C15.1@2449.92,1264.73 ; R5.2 2599.46,1225.95 2599.46,1258.36 U1.4@2606.37,1265.28 ; U1.2@2635,1531.64 U1.4 U1.4@2606.37,1265.28 ; U1.2@2635,1534.72 v2(2635,1580) ; v2(2680,1925) 2680.24,1925.24 2680.24,1994.76 R3.1 ; 1581.18,1170 1815,1170 ; C15.1@2449.92,1264.73 2587.87,1264.73 2588.42,1265.28 U1.4@2606.37,1265.28
  Bottom Layer w25: v1(1425,1170) 1300,1170 1205,1265 1205,1720 1125,1800 1125,2225.12 1164.88,2265 1595,2265 v2(1665,2335) 1750,2335 1885,2200 2405,2200 v2(2680,1925) 2680,1631.76 2635,1586.76 v2(2635,1580)
VCC_5V: 13.1 C14.1 D7.1 U1.3 | length 1010.3
  Top Layer w20: v2(1875,1365) 1875,1294.62 1879.62,1290 D7.1 ; v2(2300,1515) 2308.12,1515 2338.94,1484.18 C14.1 2390,1487.64 2390,1513.01 2401.72,1524.72 U1.3 ; 13.1@2382.68,1420.24 13.1 ; 13.1@2388.74,1424.02 2391.1,1426.38 C14.1@2391.1,1481.82
  Bottom Layer w20: v2(1875,1365) 1875,1483.28 1906.72,1515 v2(2300,1515)
pads on no net: J1.4 J2.1 J2.6 J2.7 MHNP1. MHNP2. MHNP3. MHNP4. U2.4 U2.15 U2.16 U2.17 U2.18 U2.19 U2.20 U2.21 U2.22 U2.23 U2.24 U2.25 U2.26 U2.28 U2.29 U2.30 U2.31 U2.32 U2.33 U2.34 U2.35 U2.36 U2.37 U2.39

## Polygon pours and split planes (outlines as drawn)
GND on Bottom Layer "GND" (solid, pour order 0): 1025,2575 1025,1025 2775,1025 2775,2575 2650,2575 2650,2310 1885,2310 1885,2575
GND on Top Layer "GND_L01_P010" (solid, remove dead copper, pour order 10): 1025,2575 1885,2575 1885,2310 2650,2310 2650,2575 2775,2575 2775,1025 1025,1025

## Silkscreen, mask and mechanical layers (free items; w line width, h text height)
Top Overlay:
  drawing of 194 lines, arcs and shapes, not listed
  text "PWR" at 2805,2300 h60 r90
  text "LED" at 2805,2130 h60 r90
  text "DISP" at 1052.49,1327.5 h60 r90
  text "BOOT" at 2804.99,1020.03 h60 r90
  text "RST" at 1695,1010.01 h60
Bottom Overlay:
  text "ESP32 E-Ink  / Temp/Humidity / Rev.2" at 2478.55,1580.01 h60
Board Shape:
  lines w6: 1525,1280 1525,1425 cw(c1535,1425) 1535,1435 1710,1435 cw(c1710,1425) 1720,1425 1720.26,1280 cw(c1703.85,1296.58) 1687.28,1280.17 1687.28,1402.67 1557.28,1402.67 1557.28,1312.67 1557.28,1279.17 cw(c1541.67,1295.84) 1525,1280.23
  lines w10: 825,875 ccw(c865,875) 865,835 1000,835 ccw(c1000,870) 1035,870 1035,926.72 cw(c1103.28,926.72) 1103.28,995 2696.72,995 cw(c2696.72,926.72) 2765,926.72 2765,865 ccw(c2800,865) 2800,830 2935,830 ccw(c2935,870) 2975,870 2975,1005 ccw(c2940,1005) 2940,1040 2883.28,1040 cw(c2883.28,1108.28) 2815,1108.28 2815,2486.72 cw(c2883.28,2486.72) 2883.28,2555 2940,2555 ccw(c2940,2590) 2975,2590 2975,2725 ccw(c2935,2725) 2935,2765 2800,2765 ccw(c2800,2730) 2765,2730 2765,2668.28 cw(c2696.72,2668.28) 2696.72,2600 1103.28,2600 cw(c1103.28,2668.28) 1035,2668.28 1035,2725 ccw(c1000,2725) 1000,2760 865,2760 ccw(c865,2720) 825,2720 825,2585 ccw(c860,2585) 860,2550 921.72,2550 cw(c921.72,2481.72) 990,2481.72 990,1113.28 cw(c921.72,1113.28) 921.72,1045 860,1045 ccw(c860,1010) 825,1010 825,875

## Text inside footprints (layer, text, board x,y; h text height)
J1: Mechanical 1 "PCB EDGE" at 1981.54,995.83 h40